# Altium PCB CLOCK.PcbDoc
Units mm, origin at the board's own origin, x right, y up, seen from the top; angles counter-clockwise.
Board outline 119.25 x 100.96 mm, 2 copper layers (Top Layer, Bottom Layer); 29 components, 52 nets, 197 pads, 58 vias.
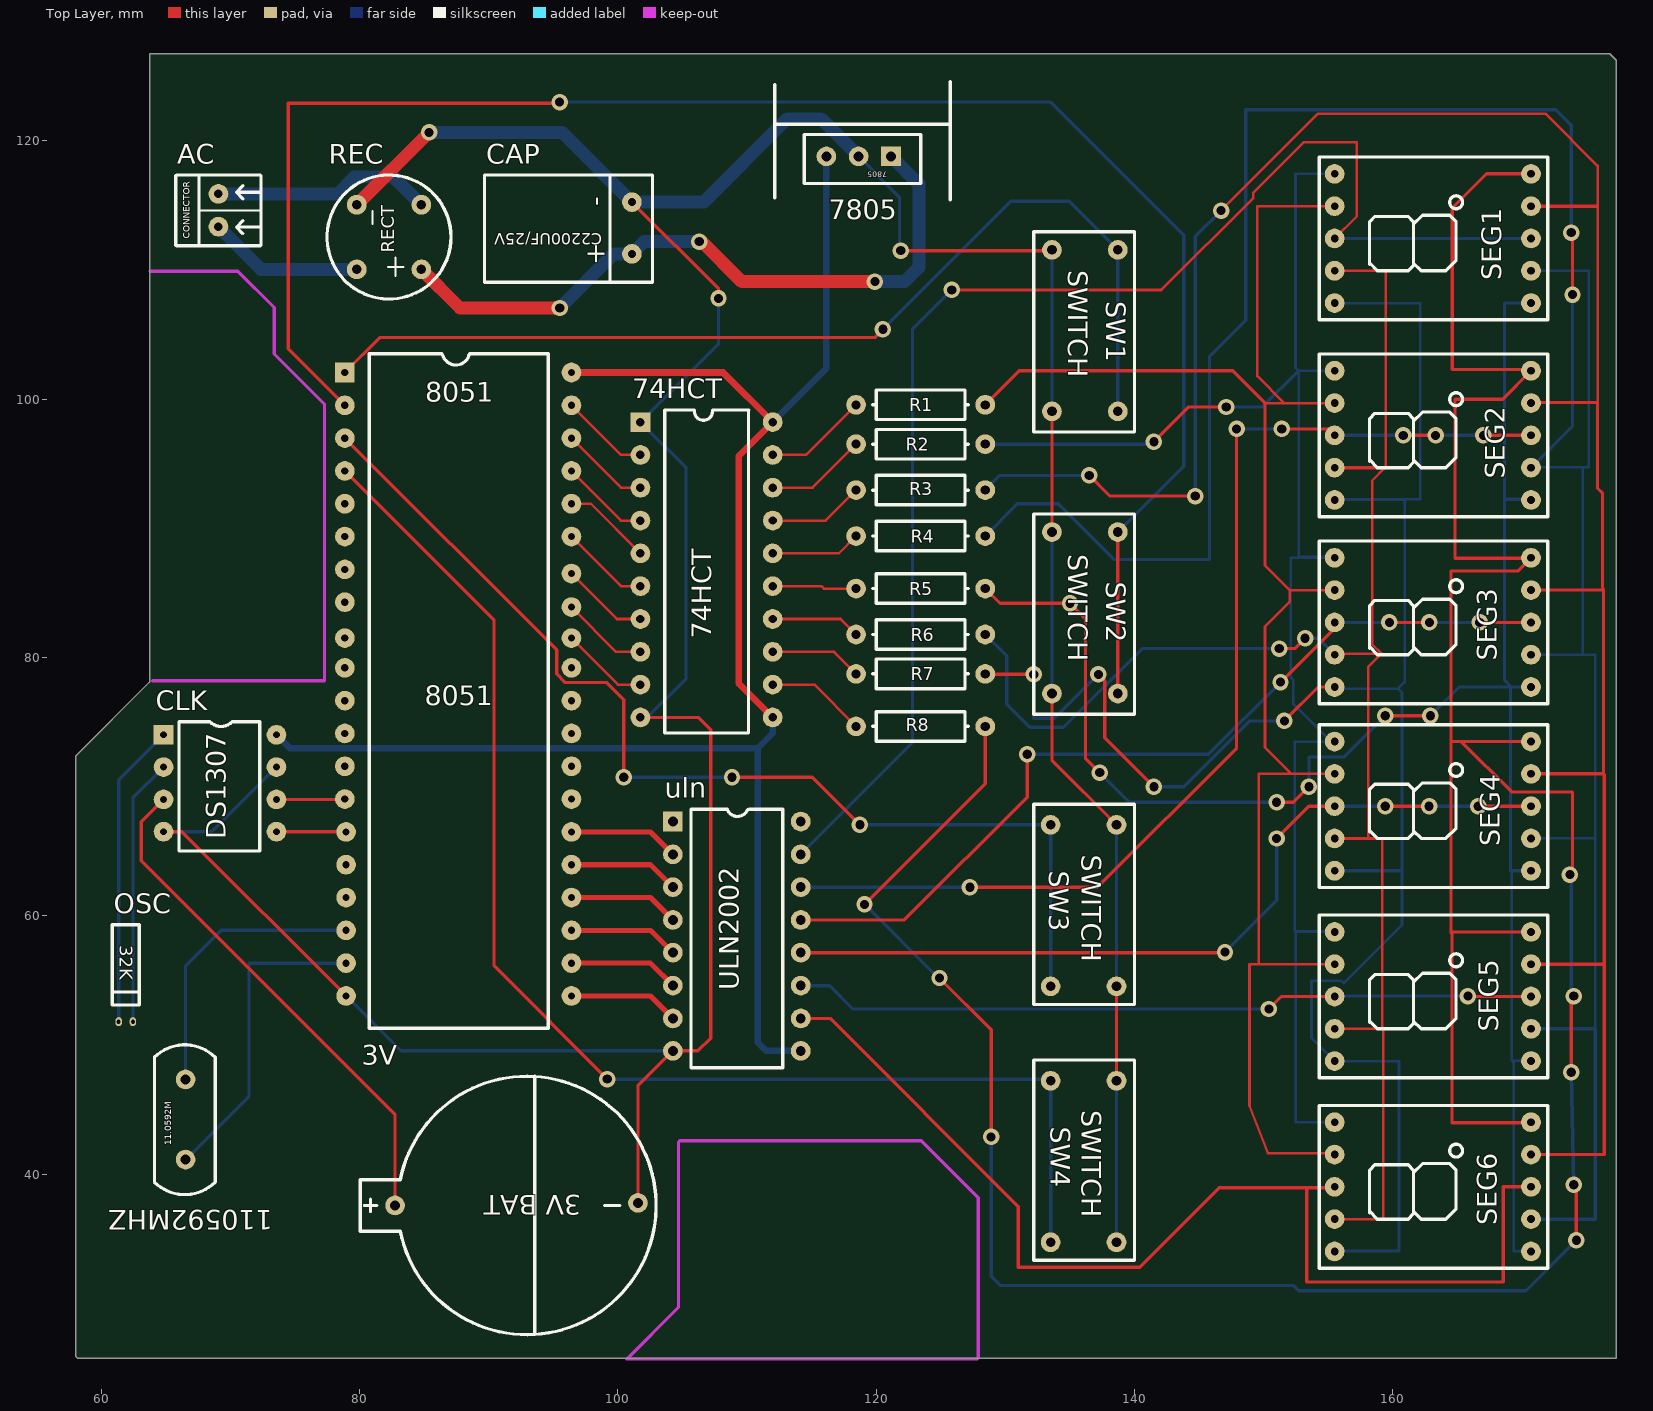
[diagram p0: Top Layer view]
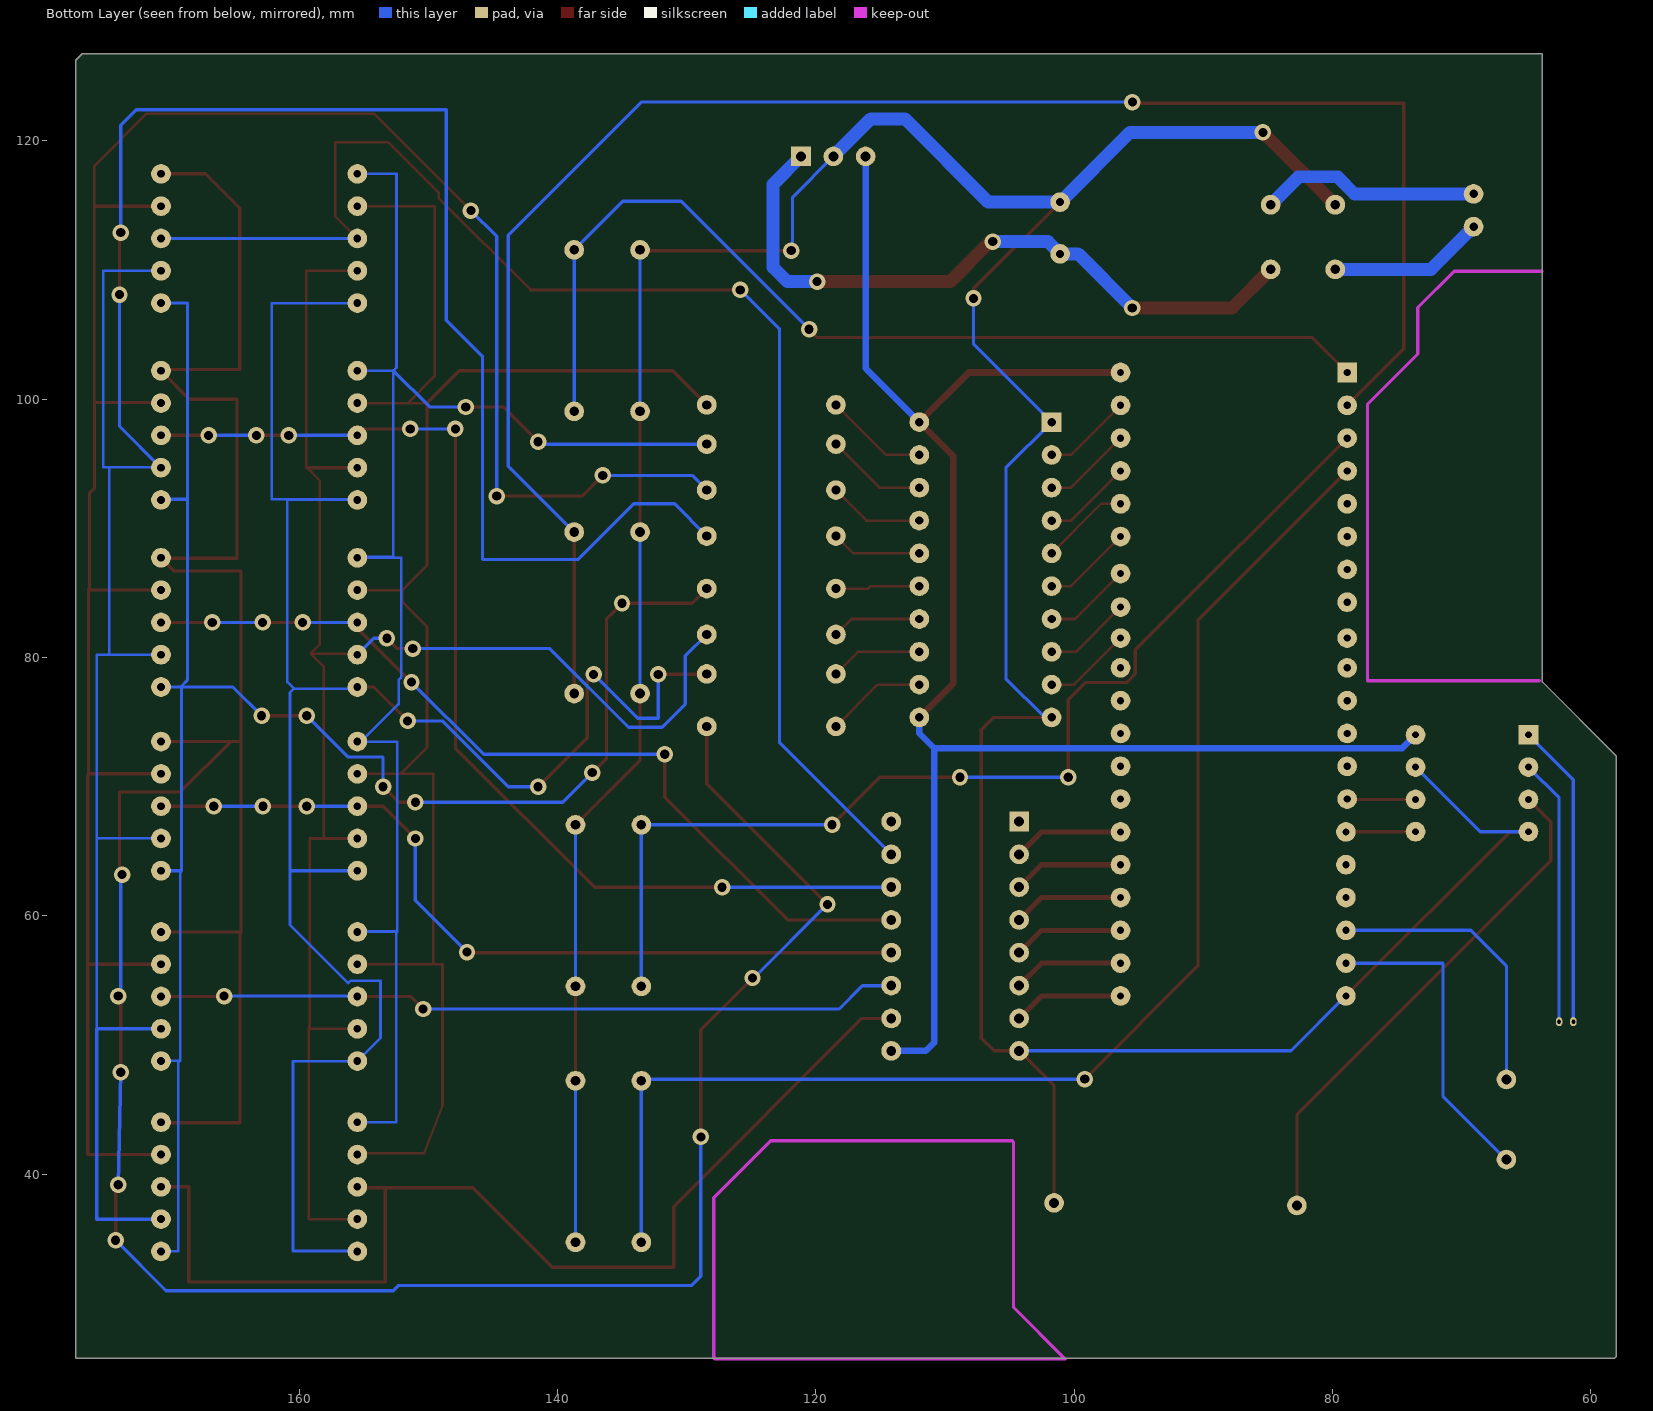
[diagram p1: Bottom Layer view, seen from below]

## Layer stack, top to bottom
Top Layer: signal copper 0.0356
Dielectric: dielectric 0.32, FR-4, Dk 4.8
Bottom Layer: signal copper 0.0356

## Board outline
58.039,25.908 58.166,25.781 177.292,25.781 177.292,126.238 176.784,126.746 63.754,126.746 63.754,78.105 58.039,72.39

## Design rules (kind name [scope] priority, off if disabled: settings)
Clearance [All] p1: gap=0.054
PolygonConnect [All] p1: connectstyle=Relief reliefconductorwidth=0.254 reliefentries=4 polygonreliefangle="90 Angle"
RoutingVias [All] p1: holewidth=0.711 width=1.27 viastyle="Through Hole" minholewidth=0.711 minwidth=1.27 maxholewidth=0.711 maxwidth=1.27
SilkscreenOverComponentPads [All] p1: minsilkscreentomaskgap=0.254
SolderMaskExpansion [All] p1: expansion=0.102
TestPointUsage [All] p1: valid=0 allowmultiple=FALSE
Testpoint [All] p1: side=15 testpointundercomponent=TRUE minsize=1.016 maxsize=2.54 preferedsize=1.524 minholesize=0 maxholesize=1.016 preferedholesize=0.813 testpointgrid=0.025 style=1023 order=0123456789
Width [All] p1: maxlimit=1.254 minlimit=0.015 preferedwidth=0.254
23 further rules are at their usual default settings.

## Components (designator, comment, footprint, x,y, rotation, side; value= is the part's Value field where it differs from the comment)
3V "Battery_3V" "3V BAT" 92.964,37.592 r90 top
74HCT "74_HCT" 74HCT 103.632,74.168 r0 top
7805 "LM7805" L7805 123.444,120.396 r180 top
8051 "Microcontroller" NUV_8051 80.772,51.308 r0 top
110592MHZ "XTAL_8051" osc_12 66.548,41.148 r90 top
AC "AC SUPPLY" CONNECTOR 69.088,114.622 r90 top
CAP "CF2200UF" CAP2200UF 101.092,111.252 r90 top
CLK "DS1307_RTC" DS1307 66.04,65.024 r0 top
OSC "OSCILLATOR" OSC_32K 61.468,51.816 r270 top
R1 "RES330" RES 123.444,99.568 r0 top
R2 "RES330" RES 123.444,96.52 r0 top
R3 "RES330" RES 123.444,92.964 r0 top
R4 "RES330" RES 123.444,89.408 r0 top
R5 "RES330" RES 123.444,85.344 r0 top
R6 "RES330" RES 123.444,81.788 r0 top
R7 "RES330" RES 123.444,78.74 r0 top
R8 "RES330" RES 123.444,74.676 r0 top
REC "Rectifire" RECT 82.296,112.552 r90 top
SEG1 "7SEGMENT" LED_Display 170.688,107.442 r90 top
SEG2 "7SEGMENT" LED_Display 170.688,92.202 r90 top
SEG3 "7SEGMENT" LED_Display 170.688,77.724 r90 top
SEG4 "7SEGMENT" LED_Display 170.688,63.5 r90 top
SEG5 "7SEGMENT" LED_Display 170.688,48.768 r90 top
SEG6 "7SEGMENT" LED_Display 170.688,34.036 r90 top
SW1 "SWITCH" SWITCH 133.604,99.06 r90 top
SW2 "SWITCH" SWITCH 133.604,77.216 r90 top
SW3 "SWITCH" SWITCH 138.604,67.056 r270 top
SW4 "SWITCH" SWITCH 138.604,47.244 r270 top
uln "ULN2002" ULN2002 105.664,48.26 r0 top

## Footprints (in the part's own frame and the unit in brackets; to place one, negate y for a bottom-side part, rotate by r counter-clockwise, add the part's x,y. Pads: shape width x height; smd on the part's side, far side on the other; paste and mask are expansions set on the pad)
"3V BAT" [mil]
  round 60 hole 30: 0(0,401.57) 1(7.87,-338.58)
  silkscreen extent -394,-394 394,508
74HCT [mm]
  rect 1.524x1.524 hole 0.652: 1(-1.88,24.06)
  round 1.524 hole 0.652: 2(-1.88,21.52) 3(-1.88,18.98) 4(-1.88,16.44) 18(8.36,18.98) 19(8.36,21.52) 20(8.36,24.06)
  round 1.524 hole 0.65: 5(-1.88,13.9) 6(-1.88,11.36) 7(-1.88,8.82) 8(-1.88,6.28) 9(-1.88,3.74) 10(-1.88,1.2) 11(8.36,1.2) 12(8.36,3.74) 13(8.36,6.28) 14(8.36,8.82) 15(8.36,11.36) 16(8.36,13.9) 17(8.366,16.44)
  silkscreen extent 0,0 6.5,25
CAP2200UF [mil]
  round 60 hole 24.41: 0(0,0) 1(157.48,0)
  silkscreen extent -87,-63 240,449
CONNECTOR [mil]
  round 60 hole 25.67: 0(-50,0) 1(50,0)
  silkscreen extent -108,-130 107,130
DS1307 [mm]
  rect 1.524x1.524 hole 0.52: 1(-1.2,9)
  round 1.524 hole 0.52: 2(-1.2,6.5) 3(-1.2,4) 4(-1.2,1.5) 5(7.54,1.5) 6(7.54,4) 7(7.54,6.5) 8(7.54,9)
  silkscreen extent 0,0 6.25,10
L7805 [mil]
  rect 60x60 hole 30: 1(90.55,62.99)
  round 60 hole 30: 2(188.98,62.99) 3(287.4,62.99)
  silkscreen extent 0,-4 354,146
LED_Display [mil]
  round 60 hole 23.62: 1(0,0) 2(98.43,0) 3(196.85,0) 4(295.28,0) 5(393.7,0) 6(393.7,598.43) 7(295.28,598.43) 8(196.85,598.43) 9(98.43,598.43) 10(0,598.43)
  silkscreen extent -51,-51 445,646
NUV_8051 [mil]
  rect 60x60 hole 22.13: 1(-74.8,1998.43)
  round 60 hole 22.13: 2(-74.8,1898.43) 3(-74.8,1798.43) 4(-74.8,1698.43) 5(-74.8,1598.43) 6(-74.8,1498.43) 7(-74.8,1398.43) 8(-74.8,1298.43) 9(-74.8,1188.98) 10(-74.8,1098.43) 11(-74.8,998.43) 12(-74.8,898.43) 13(-74.8,798.43) 14(-74.8,698.43) 15(-70.87,598.43) 16(-70.87,498.43) 17(-70.87,398.43) 18(-70.87,298.43) 19(-70.87,198.43) 20(-70.87,98.43) 21(615.75,98.43) 22(615.75,198.43) 23(615.75,298.43) 24(615.75,398.43) 25(615.75,498.43) 26(615.75,598.43) 27(615.75,698.43) 28(615.75,798.43) 29(615.75,898.43) 30(615.75,998.43) 31(615.75,1098.43) 32(615.75,1188.98) 33(615.75,1283.46) 34(615.75,1385.83) 35(615.75,1498.43) 36(615.75,1598.43) 37(615.75,1698.43) 38(615.75,1798.43) 39(615.75,1898.43) 40(615.75,1998.43)
  silkscreen extent 0,0 545,2056
osc_12 [mil]
  round 60 hole 30: 0(0,0) 1(244.09,0)
  silkscreen extent -107,-90 350,95
OSC_32K [mm]
  oval 0.7x0.5 hole 0.32: 0(0,1) 1(0,-0.1)
  silkscreen extent -7.5,-0.6 -1.3,1.5
RECT [mil]
  round 60 hole 29.53: 0(-98.43,-98.43) 1(98.42,98.43) 2(98.42,-98.43)
  round 60 hole 29.61: 3(-98.43,98.43)
  silkscreen extent -189,-189 189,189
RES [mm]
  round 1.524 hole 0.7: 0(-5,0) 1(5,0)
  silkscreen extent -3.7,-1.14 3.7,1.14
SWITCH [mil]
  round 60 hole 29.61: 0(0,0) 1(492.13,0) 2(0,-200.79) 3(492.13,-200.79)
  silkscreen extent -63,-252 547,55
ULN2002 [mil]
  rect 60x60 hole 30: 1(-55.12,750)
  round 60 hole 30: 2(-55.12,650) 3(-55.12,550) 4(-55.12,450) 5(-55.12,350.39) 6(-55.12,250) 7(-55.12,150) 8(-55.12,51.18) 9(334.65,51.18) 10(334.65,150) 11(334.65,250) 12(334.65,350.39) 13(334.65,450) 14(334.65,550) 15(334.65,650) 16(334.65,750)
  silkscreen extent 0,0 280,787

## Part data
8051: library part 8051
SEG1 SEG2 SEG3 SEG4 SEG5 SEG6: library part 7-SEGMENTS

## Free pads (board coordinates)
  round 2.524 on Drill Drawing: 0(63,30) 2(142.4,121.2) 3(68.5,122.9)
  round 2.54 on Drill Drawing: 1(175.1,27.8)

## Via types
v1: diameter 1.27, hole 0.711, Top Layer to Bottom Layer, 58 vias

## Nets (pads, with @x,y where several pads share a name; then routed paths per layer and width w, separated by ;. In a path a pad name is that pad's centre, name@x,y a point inside that pad or via, vN(x,y) a via of type N, cw(c..) or ccw(c..) an arc to the next point about the centre after c; other vN are vias at no path point)
A_7: R1.1 SEG1.7 SEG2.7 SEG3.7 SEG4.7 SEG5.7 SEG6.7 | length 133.6
  Top Layer w0.2: 149.6,56.268 149.6,71 152.148,71 ; SEG6.7@155.392,41.632 150.332,41.632 148.9,45.3 148.9,56.268 SEG5.7 ; SEG3.7@155.466,85.202 152.024,85.202 ; SEG4.7 152.148,71 ; SEG2.7 151.582,99.702 ; SEG1.7 149.5,114.942 149.5,101.784 151.582,99.702 ; 151.582,99.702 150.1,99.702 150.1,87.126 152.024,85.202 ; 152.024,85.202 152.024,84.324 150.1,82.4 150.1,73.048 152.148,71
  Top Layer w0.254: R1.1 131.076,102.2 147.602,102.2 150.1,99.702 ; SEG6.7@155.392,41.632 SEG6.7 ; SEG3.7@155.466,85.202 SEG3.7 ; SEG4.7 SEG4.7@155.949,71
B_6: R2.1 SEG1.6 SEG2.6 SEG3.6 SEG4.6 SEG5.6 SEG6.6 | length 123.9
  Top Layer w0.254: v1(141.5,96.7) 144.2,99.4 v1(147.1,99.4)
  Bottom Layer w0.2: SEG4.6@155.2,73.5 152.3,76.4 152.3,78.254 152.1,78.454 152.1,87.724 SEG3.6 ; SEG3.6@155.412,87.8 152.7,87.8 152.7,102.2 ; SEG5.6@155.456,58.8 152.4,58.8 ; SEG2.6@155.486,102.2 152.7,102.2 ; SEG6.6 152.464,44.036 152.464,58.736 152.4,58.8 ; SEG4.6 152.4,73.5 152.4,58.8 ; SEG1.6 152.458,117.442 152.458,102.442 152.7,102.2
  Bottom Layer w0.254: R2.1 141.32,96.52 v1(141.5,96.7) ; v1(147.1,99.4) 149.9,99.4 152.7,102.2 ; SEG5.6@154.907,58.768 SEG5.6 SEG5.6@155.456,58.8 ; SEG3.6@155.06,87.724 SEG3.6 SEG3.6@155.412,87.8 ; SEG4.6@155.2,73.5 SEG4.6 ; SEG2.6@155.486,102.2 SEG2.6
C_4: R3.1 SEG1.4 SEG2.4 SEG3.4 SEG4.4 SEG5.4 SEG6.4 | length 184.2
  Top Layer w0.2: v1(146.7,114.6) 154.2,122.1 171.8,122.1 175.842,118.058 175.842,114.942 175.842,99.742
  Top Layer w0.254: v1(136.5,94.1) 138.1,92.5 v1(144.7,92.5) ; SEG6.4 176.364,41.536 176.364,56.264 ; SEG4.4 176.3,71 ; SEG2.4 170.728,99.742 175.842,99.742 175.842,93.089 176.224,92.707 176.224,85.3 ; SEG1.4 175.842,114.942 ; SEG5.4@170.692,56.264 SEG5.4 176.36,56.268 176.36,70.94 176.3,71 ; SEG3.4@170.764,85.3 SEG3.4 176.224,85.224 176.224,85.3 ; 176.224,85.3 176.3,85.3 176.3,71
  Bottom Layer w0.254: R3.1 129.58,94.1 v1(136.5,94.1) ; v1(144.7,92.5) 144.7,112.6 v1(146.7,114.6) ; SEG5.4@170.568,56.388 SEG5.4
CLK_SCL: 8051.14 CLK.6 | length 5.3
  Top Layer w0.254: CLK.6 78.848,69.024 8051.14
CLK_SDA: 8051.15 CLK.5 | length 5.4
  Top Layer w0.254: CLK.5 78.956,66.524 8051.15
D_2: R4.1 SEG1.2 SEG2.2 SEG3.2 SEG4.2 SEG5.2 SEG6.2 | length 212.5
  Top Layer w0.254: SEG5.2 SEG5.2@170.688,51.816 ; v1(173.8,112.9) 173.9,112.8 v1(173.9,108.1)
  Bottom Layer w0.2: SEG3.2 174.7,80.224 ; SEG1.2 175.158,109.942 175.158,94.742 174.7,94.742 ; SEG4.2@170.712,66.024 175.676,66.024 ; SEG2.2@170.728,94.742 174.7,94.742 ; 175.676,51.276 175.676,66.024 ; 174.7,80.224 175.676,80.224 175.676,66.024 ; 174.7,80.224 174.7,94.742
  Bottom Layer w0.254: R4.1 130.936,91.9 134.1,91.9 138.4,87.6 145.8,87.6 145.8,103.3 148.6,106.1 148.6,122.4 172.6,122.4 173.8,121.2 v1(173.8,112.9) ; SEG6.2 170.692,36.532 175.668,36.532 175.668,51.268 SEG5.2 ; SEG4.2 SEG4.2@170.712,66.024 ; SEG2.2 170.728,94.742 173.9,97.914 v1(173.9,108.1)
DP_5: R8.1 SEG1.5 SEG2.5 SEG3.5 SEG4.5 SEG5.5 SEG6.5 | length 262.1
  Top Layer w0.254: v1(119.1,60.9) 128.444,70.244 R8.1 ; v1(124.9,55.2) 128.9,51.2 v1(128.9,42.9) ; SEG5.5@170.62,58.7 SEG5.5 164.568,58.768 164.568,58.7 ; SEG6.5 170.652,44 164.6,44 164.568,44.032 164.568,58.7 ; SEG4.5 165.3,73.5 ; SEG3.5 SEG3.5@170.664,87.7 ; SEG1.5 167.242,117.442 164.6,114.8 164.6,102.3 170.59,102.3 SEG2.5 168.486,100 164.8,100 164.8,87.7 SEG3.5@170.664,87.7 ; v1(173.7,63.2) 173.9,63.4 173.9,69.6 169.2,69.6 165.3,73.5 ; v1(173.8,47.9) 173.8,53.6 v1(174,53.8) ; v1(174,39.2) 174.2,39.2 v1(174.2,34.9) ; 164.5,73.5 165.3,73.5 ; 164.5,73.5 164.5,86.7 169.664,86.7 SEG3.5@170.664,87.7 ; 164.5,73.5 164.5,58.7 164.568,58.7
  Bottom Layer w0.254: v1(119.1,60.9) 124.8,55.2 v1(124.9,55.2) ; v1(128.9,42.9) 128.9,32.1 129.6,31.4 152.3,31.4 152.7,31 170.3,31 v1(174.2,34.9) ; v1(173.7,63.2) 173.8,63.1 173.8,54 v1(174,53.8) ; v1(173.8,47.9) v1(174,39.2)
E_1: R5.1 SEG1.1 SEG2.1 SEG3.1 SEG4.1 SEG5.1 SEG6.1 | length 143.2
  Top Layer w0.254: R5.1 129.587,84.201 v1(135.001,84.201) 136.2,83.002 136.2,72.2 v1(137.3,71.1) ; v1(151,68.8) 152.3,68.8 v1(153.5,70) ; v1(159.4,75.5) v1(162.9,75.5)
  Bottom Layer w0.2: 165.124,77.724 169.1,77.724 ; 169.2,63.4 169.2,48.8 ; SEG5.1@170.656,48.8 169.2,48.8 ; SEG6.1 169.336,34.036 169.336,48.664 169.2,48.8
  Bottom Layer w0.254: v1@135.001,83.947 v1(135.001,84.201) ; v1(137.3,71.1) 139.6,68.8 v1(151,68.8) ; v1(153.5,70) 153.5,72.3 156.2,72.3 v1(159.4,75.5) ; v1(162.9,75.5) 165.124,77.724 ; 169.2,63.4 169.1,63.5 ; SEG3.1@170.612,77.8 SEG3.1 169.176,77.724 ; SEG5.1@170.656,48.8 SEG5.1 ; SEG4.1 169.1,63.5 ; SEG2.1 170.632,92.258 168.642,92.258 ; SEG1.1 168.642,107.442 168.642,92.258 ; 168.642,92.258 168.642,78.258 169.1,77.8 ; 169.1,63.5 169.1,77.724 ; 169.1,77.724 169.1,77.8 ; 169.1,77.724 169.176,77.724 ; 169.1,77.8 169.176,77.724
F_9: R6.1 SEG1.9 SEG2.9 SEG3.9 SEG4.9 SEG5.9 SEG6.9 | length 135.9
  Top Layer w0.2: SEG4.9@155.42,66 159.1,66 ; SEG6.9 159.236,36.536 159.236,51.336 ; SEG5.9 159.168,51.268 ; SEG4.9 158.1,66 158.1,79.302 159.1,80.302 ; SEG1.9 159.442,109.942 159.442,94.742 158.4,93.7 158.4,81.002 159.1,80.302 ; SEG3.9@155.566,80.302 159.1,80.302 ; 159.168,51.336 159.168,66
  Top Layer w0.254: R6.1 R6.1@128.698,81.534 ; v1(151.2,80.7) 152.4,80.7 v1(153.2,81.5) ; SEG3.9 SEG3.9@155.566,80.302 ; SEG2.9 159.402,94.702 ; 159.168,51.268 159.168,51.336 159.236,51.336
  Bottom Layer w0.254: R6.1 130.1,80.132 130.1,76.4 131.9,74.6 134.5,74.6 140.6,80.7 v1(151.2,80.7) ; v1(153.2,81.5) 154.212,81.5 SEG3.9
G_10: R7.1 SEG1.10 SEG2.10 SEG3.10 SEG4.10 SEG5.10 SEG6.10 | length 159.2
  Top Layer w0.254: R7.1 128.484,78.7 v1(132.2,78.7) ; v1(137.2,78.7) 137.7,78.2 137.7,73.8 v1(141.5,70) ; v1(151.6,75.1) 154.224,77.724 SEG3.10
  Bottom Layer w0.2: SEG2.10 160.9,92.202 160.9,78.1 160.4,77.6 ; SEG1.10 162.1,107.442 162.1,92.242 SEG2.10@155.528,92.242 ; SEG6.10@155.52,34.068 160.468,34.068 160.468,48.768 SEG5.10 153.7,50.556 153.7,55 156,55 156.2,54.8 160.7,59.3 160.7,63.5 160.7,77.3 160.4,77.6 ; SEG3.10@155.612,77.6 160.4,77.6
  Bottom Layer w0.254: v1(132.2,78.7) 132.2,75.3 133.8,75.3 v1(137.2,78.7) ; v1(141.5,70) 143.8,70 148.9,75.1 v1(151.6,75.1) ; SEG6.10 SEG6.10@155.52,34.068 ; SEG2.10 SEG2.10@155.528,92.242 ; SEG4.10@155.688,63.7 SEG4.10 160.7,63.5
GND: 3V.1 74HCT.1 74HCT.10 7805.2 8051.20 CAP.1 CLK.4 CLK.7 REC.1 SW1.0 SW1.1 SW2.0 SW2.1 SW3.0 SW3.1 SW4.0 SW4.1 uln.8 | length 298.1
  Top Layer w0.254: CLK.4 66.256,66.524 8051.20 ; CAP.1 107.8,108.544 v1(107.8,107.8) ; 3V.1 101.564,46.86 uln.8 106.202,49.56 107.188,50.546 107.188,74.422 106.242,75.368 74HCT.10 ; v1(121.9,111.5) SW1.1@133.544,111.5 ; SW2.0 133.604,72.056 SW3.0 ; SW2.1 SW1.0 ; SW4.0 SW3.1
  Top Layer w1: REC.1 v1(85.394,120.65) ; SW1.1@133.544,111.5 SW1.1
  Bottom Layer w0.254: CLK.4 68.58,66.524 CLK.7 ; 8051.20 83.22,49.56 uln.8 ; 74HCT.10 102.292,75.368 105.283,78.359 105.283,94.697 74HCT.1 107.8,104.276 v1(107.8,107.8) ; 7805.2 121.8,115.64 v1@121.8,111.6 ; SW2.0 SW2.1 ; SW1.0 SW1.1 ; SW4.1 SW4.0 ; SW3.1 SW3.0
  Bottom Layer w1: v1(85.394,120.65) 95.694,120.65 CAP.1 106.652,115.252 113.1,121.7 115.74,121.7 7805.2 ; v1@121.8,111.6 v1(121.9,111.5)
Net3V_0: 3V.0 CLK.3 | length 40.3
  Top Layer w0.254: CLK.3 63.119,67.303 63.119,64.262 82.764,44.617 3V.0
Net74HCT_12: 74HCT.12 R8.0 | length 7.8
  Top Layer w0.2: 74HCT.12 115.212,77.908 R8.0
Net74HCT_13: 74HCT.13 R7.0 | length 7.2
  Top Layer w0.2: 74HCT.13 116.736,80.448 R7.0
Net74HCT_14: 74HCT.14 R6.0 | length 6.9
  Top Layer w0.2: 74HCT.14 117.244,82.988 R6.0
Net74HCT_15: 74HCT.15 R5.0 | length 6.8
  Top Layer w0.2: 74HCT.15 115.772,85.528 115.956,85.344 R5.0
  Top Layer w0.254: R5.0@118.26,85.528 R5.0
Net74HCT_16: 74HCT.16 R4.0 | length 7
  Top Layer w0.2: 74HCT.16 117.104,88.068 R4.0
Net74HCT_17: 74HCT.17 R3.0 | length 7.4
  Top Layer w0.2: 74HCT.17 116.088,90.608 R3.0
Net74HCT_18: 74HCT.18 R2.0 | length 7.8
  Top Layer w0.2: 74HCT.18 115.072,93.148 R2.0
Net74HCT_19: 74HCT.19 R1.0 | length 8.1
  Top Layer w0.2: 74HCT.19 114.564,95.688 R1.0
Net7805_1: 7805.1 CAP.0 REC.0 | length 53.1
  Top Layer w0.254: v1(106.3,112.2) v1@106.5,112.2
  Top Layer w1: REC.0 87.787,107.061 v1(95.504,107.061) ; v1@106.5,112.2 109.6,109.1 v1(119.9,109.1)
  Bottom Layer w1: v1(95.504,107.061) 99.695,111.252 CAP.0 102.04,112.2 v1(106.3,112.2) ; v1(119.9,109.1) 122.2,109.1 123.3,110.2 123.3,116.64 7805.1
Net8051_18: 8051.18 110592MHZ.1 | length 22.4
  Bottom Layer w0.254: 110592MHZ.1 66.548,56.134 69.302,58.888 8051.18
Net8051_19: 8051.19 110592MHZ.0 | length 24.7
  Bottom Layer w0.254: 110592MHZ.0 71.461,46.061 71.461,56.348 8051.19
NetAC_0: AC.0 REC.3 | length 12.1
  Bottom Layer w1: AC.0 72.388,110.052 REC.3
NetAC_1: AC.1 REC.2 | length 17.2
  Bottom Layer w1: AC.1 78.3,115.892 79.629,117.221 82.627,117.221 REC.2
NetCLK_1: CLK.1 OSC.1 | length 23.6
  Bottom Layer w0.254: OSC.1 61.368,70.552 CLK.1
NetCLK_2: CLK.2 OSC.0 | length 20.7
  Bottom Layer w0.254: OSC.0 62.468,69.152 CLK.2
PD0: 74HCT.2 8051.39 | length 6.9
  Top Layer w0.2: 8051.39 100.252,95.688 74HCT.2
PD1: 74HCT.3 8051.38 | length 6.9
  Top Layer w0.2: 8051.38 100.252,93.148 74HCT.3
PD2: 74HCT.4 8051.37 | length 6.9
  Top Layer w0.2: 8051.37 100.252,90.608 74HCT.4
PD3: 74HCT.5 8051.36 | length 6.9
  Top Layer w0.2: 8051.36 97.912,91.908 74HCT.5
PD4: 74HCT.6 8051.35 | length 6.9
  Top Layer w0.2: 8051.35 100.252,85.528 74HCT.6
PD5: 74HCT.7 8051.34 | length 6.8
  Top Layer w0.2: 8051.34 99.932,82.988 74HCT.7
PD6: 74HCT.8 8051.33 | length 6.8
  Top Layer w0.2: 8051.33 99.872,80.448 74HCT.8
PD7: 74HCT.9 8051.32 | length 6.8
  Top Layer w0.2: 8051.32 100.012,77.908 74HCT.9
SEG1_ULN: SEG1.3 SEG1.8 uln.15 | length 108.2
  Top Layer w0.2: 142.058,108.458 149.192,115.592 149.192,115.992 153.1,119.9 157.2,119.9 157.2,114.154 SEG1.8
  Top Layer w0.254: v1(125.857,108.458) 142.058,108.458
  Bottom Layer w0.2: SEG1.8 SEG1.3
  Bottom Layer w0.254: uln.15 122.809,73.415 122.809,105.41 v1(125.857,108.458)
SEG2_ULN: SEG2.3 SEG2.8 uln.14 | length 86
  Top Layer w0.254: v1(127.254,62.23) 137.13,62.23 147.9,73 v1(147.9,97.7) ; v1(151.4,97.7) 154.99,97.7 SEG2.8 ; v1(160.8,97.2) v1(163.3,97.2) ; v1(167.002,97.202) SEG2.3
  Bottom Layer w0.254: uln.14 v1(127.254,62.23) ; v1(147.9,97.7) v1(151.4,97.7) ; SEG2.8 SEG2.8@155.49,97.2 ; SEG2.8@155.535,97.155 SEG2.8@155.49,97.2 ; v1(160.8,97.2) SEG2.8@155.49,97.2 ; v1(163.3,97.2) 163.302,97.202 v1(167.002,97.202) ; SEG2.3@170.641,97.155 SEG2.3
SEG3_ULN: SEG3.3 SEG3.8 uln.13 | length 68.3
  Top Layer w0.254: uln.13 122.19,59.69 131.699,69.199 v1(131.699,72.517) ; v1(151.3,78.1) 155.488,82.288 SEG3.8 ; v1(159.724,82.724) v1(162.824,82.724) ; v1(166.724,82.724) SEG3.3
  Bottom Layer w0.254: v1(131.699,72.517) 145.717,72.517 v1(151.3,78.1) ; SEG3.8 v1(159.724,82.724) ; v1(162.824,82.724) v1(166.724,82.724)
SEG4_ULN: SEG4.3 SEG4.8 uln.12 | length 64
  Top Layer w0.254: uln.12 146.96,57.16 v1(147,57.2) ; v1(151,66) 153.5,68.5 SEG4.8 ; v1(159.4,68.5) v1(162.8,68.5) ; v1(166.6,68.5) SEG4.3
  Bottom Layer w0.254: v1(147,57.2) 151,61.2 v1(151,66) ; SEG4.8 v1(159.4,68.5) ; v1(162.8,68.5) v1(166.6,68.5)
SEG5_ULN: SEG5.3 SEG5.8 uln.11 | length 57.7
  Top Layer w0.254: v1(150.4,52.8) 151.368,53.768 SEG5.8 ; v1(165.8,53.8) 165.832,53.768 SEG5.3
  Bottom Layer w0.254: uln.11 116.39,54.61 118.2,52.8 v1(150.4,52.8) ; SEG5.8@155.52,53.8 v1(165.8,53.8)
SEG6_ULN: SEG6.3 SEG6.8 uln.10 | length 87
  Top Layer w0.254: uln.10 116.43,52.07 131,37.5 131,32.8 140.4,32.8 146.564,38.964 153.336,38.964 ; SEG6.8@155.154,39.37 SEG6.8 ; SEG6.8@155.416,38.964 153.336,38.964 ; SEG6.3 168.536,39.036 168.536,31.664 153.336,31.664 153.336,38.964
SW_1: 8051.1 SW1.2 SW1.3 | length 79.4
  Top Layer w0.254: 8051.1 81.579,104.775 119.888,104.775 v1(120.523,105.41)
  Bottom Layer w0.254: v1(120.523,105.41) 130.429,115.316 134.948,115.316 SW1.3 SW1.2
SW_2: 8051.2 SW2.2 SW2.3 | length 136.4
  Top Layer w0.254: 8051.2 74.5,103.9 74.5,122.9 95.4,122.9 v1(95.5,123) ; SW2.2 SW2.3
  Bottom Layer w0.254: v1(95.5,123) 133.5,123 143.8,112.7 143.8,94.812 SW2.3
SW_3: 8051.3 SW3.2 SW3.3 | length 84.1
  Top Layer w0.254: 8051.3 95.269,80.591 95.269,78.735 95.939,78.065 99.137,78.065 100.457,76.745 v1(100.457,70.739) ; v1(108.839,70.739) 115.062,70.739 v1(118.745,67.056)
  Bottom Layer w0.254: v1(100.457,70.739) v1(108.839,70.739) ; v1(118.745,67.056) SW3.2 SW3.3
SW_4: 8051.4 SW4.2 SW4.3 | length 102.4
  Top Layer w0.254: 8051.4 90.424,82.896 90.424,56.134 v1(99.187,47.371)
  Bottom Layer w0.254: v1(99.187,47.371) 133.377,47.371 SW4.2 SW4.3
ULN_1: 8051.26 uln.2 | length 8.6
  Top Layer w0.4: 8051.26 102.526,66.508 uln.2
ULN_2: 8051.25 uln.3 | length 8.6
  Top Layer w0.4: 8051.25 102.526,63.968 uln.3
ULN_3: 8051.24 uln.4 | length 8.6
  Top Layer w0.4: 8051.24 102.526,61.428 uln.4
ULN_4: 8051.23 uln.5 | length 8.6
  Top Layer w0.4: 8051.23 102.536,58.888 uln.5
ULN_5: 8051.22 uln.6 | length 8.6
  Top Layer w0.4: 8051.22 102.526,56.348 uln.6
ULN_6: 8051.21 uln.7 | length 8.6
  Top Layer w0.4: 8051.21 102.526,53.808 uln.7
VCC: 74HCT.11 74HCT.20 7805.3 8051.40 CLK.8 uln.9 | length 131.4
  Top Layer w0.508: 8051.40 108.152,102.068 74HCT.20 109.347,95.583 109.347,78.013 74HCT.11
  Bottom Layer w0.508: CLK.8 74.619,72.985 110.831,72.985 ; 74HCT.11 111.992,74.146 110.831,72.985 ; 74HCT.20 116.144,102.38 7805.3 ; uln.9 111.476,49.56 110.831,50.205 110.831,72.985
pads on no net: 8051.5 8051.6 8051.7 8051.8 8051.9 8051.10 8051.11 8051.12 8051.13 8051.16 8051.17 8051.27 8051.28 8051.29 8051.30 8051.31 uln.1 uln.16

## Keep-outs
Keep-Out Layer:
  lines w0.254: 63.8,109.9 70.6,109.9 73.4,107.1 73.4,103.5 77.3,99.6 77.3,78.2 64,78.2 ; 108.2,42.6 123.5,42.6 127.9,38.2 127.9,25.8 127.8,25.7 100.7,25.7 104.7,29.7 104.7,42.5 104.8,42.6 108.5,42.6
  text "CUT" at 69.8,98 h1.52 r270
  text "CUT" at 111.4,33.4 h1.52

## Silkscreen, mask and mechanical layers (free items; w line width, h text height)
Top Overlay:
  lines w0.254: 112.141,115.57 112.141,124.333 ; 112.268,121.285 125.603,121.285 ; 125.73,115.443 125.73,124.587
Mechanical 1:
  lines w0.254: 58.039,25.908 58.039,72.39 63.754,78.105 63.754,126.746 176.784,126.746 177.292,126.238 177.292,25.781 102.235,25.781 ; 58.039,25.908 58.166,25.781 ; 58.039,25.908 58.166,25.781 ; 58.039,25.908 58.166,25.781 ; 58.166,25.781 102.235,25.781 ; 58.166,25.781 102.235,25.781 ; 58.166,25.781 102.235,25.781

## Dimensions
57.9,24.4 to 177.4,24.5 on Top Overlay
58.039,25.908 to 63.754,126.746 on Top Overlay

## Text inside footprints (layer, text, board x,y; h text height)
3V: Top Overlay "3V BAT" at 97.164,38.392 h1.52 r180
110592MHZ: Top Overlay "11.0592M" at 65.448,42.248 h0.5 r90
AC: Top Overlay "CONNECTOR" at 66.888,112.422 h0.5 r90
CAP: Top Overlay "C2200UF/25V" at 98.792,113.152 h1.52 r180; Top Overlay "+" at 98.992,110.352 h1.52 r90; Top Overlay "-" at 98.992,114.952 h1.52 r90
CLK: Top Overlay "DS1307" at 69.64,65.924 h1.52 r90
OSC: Top Overlay "32K" at 61.468,57.716 h1.02 r270
REC: Top Overlay "RECT" at 82.696,111.352 h1.02 r90